# Altium PCB Upper Board.PcbDoc
Units mm, origin at the board's own origin, x right, y up, seen from the top; angles counter-clockwise.
Board outline 175.99 x 147.23 mm, 2 copper layers (Top Layer, Bottom Layer); 41 components, 65 nets, 224 pads, 72 vias.
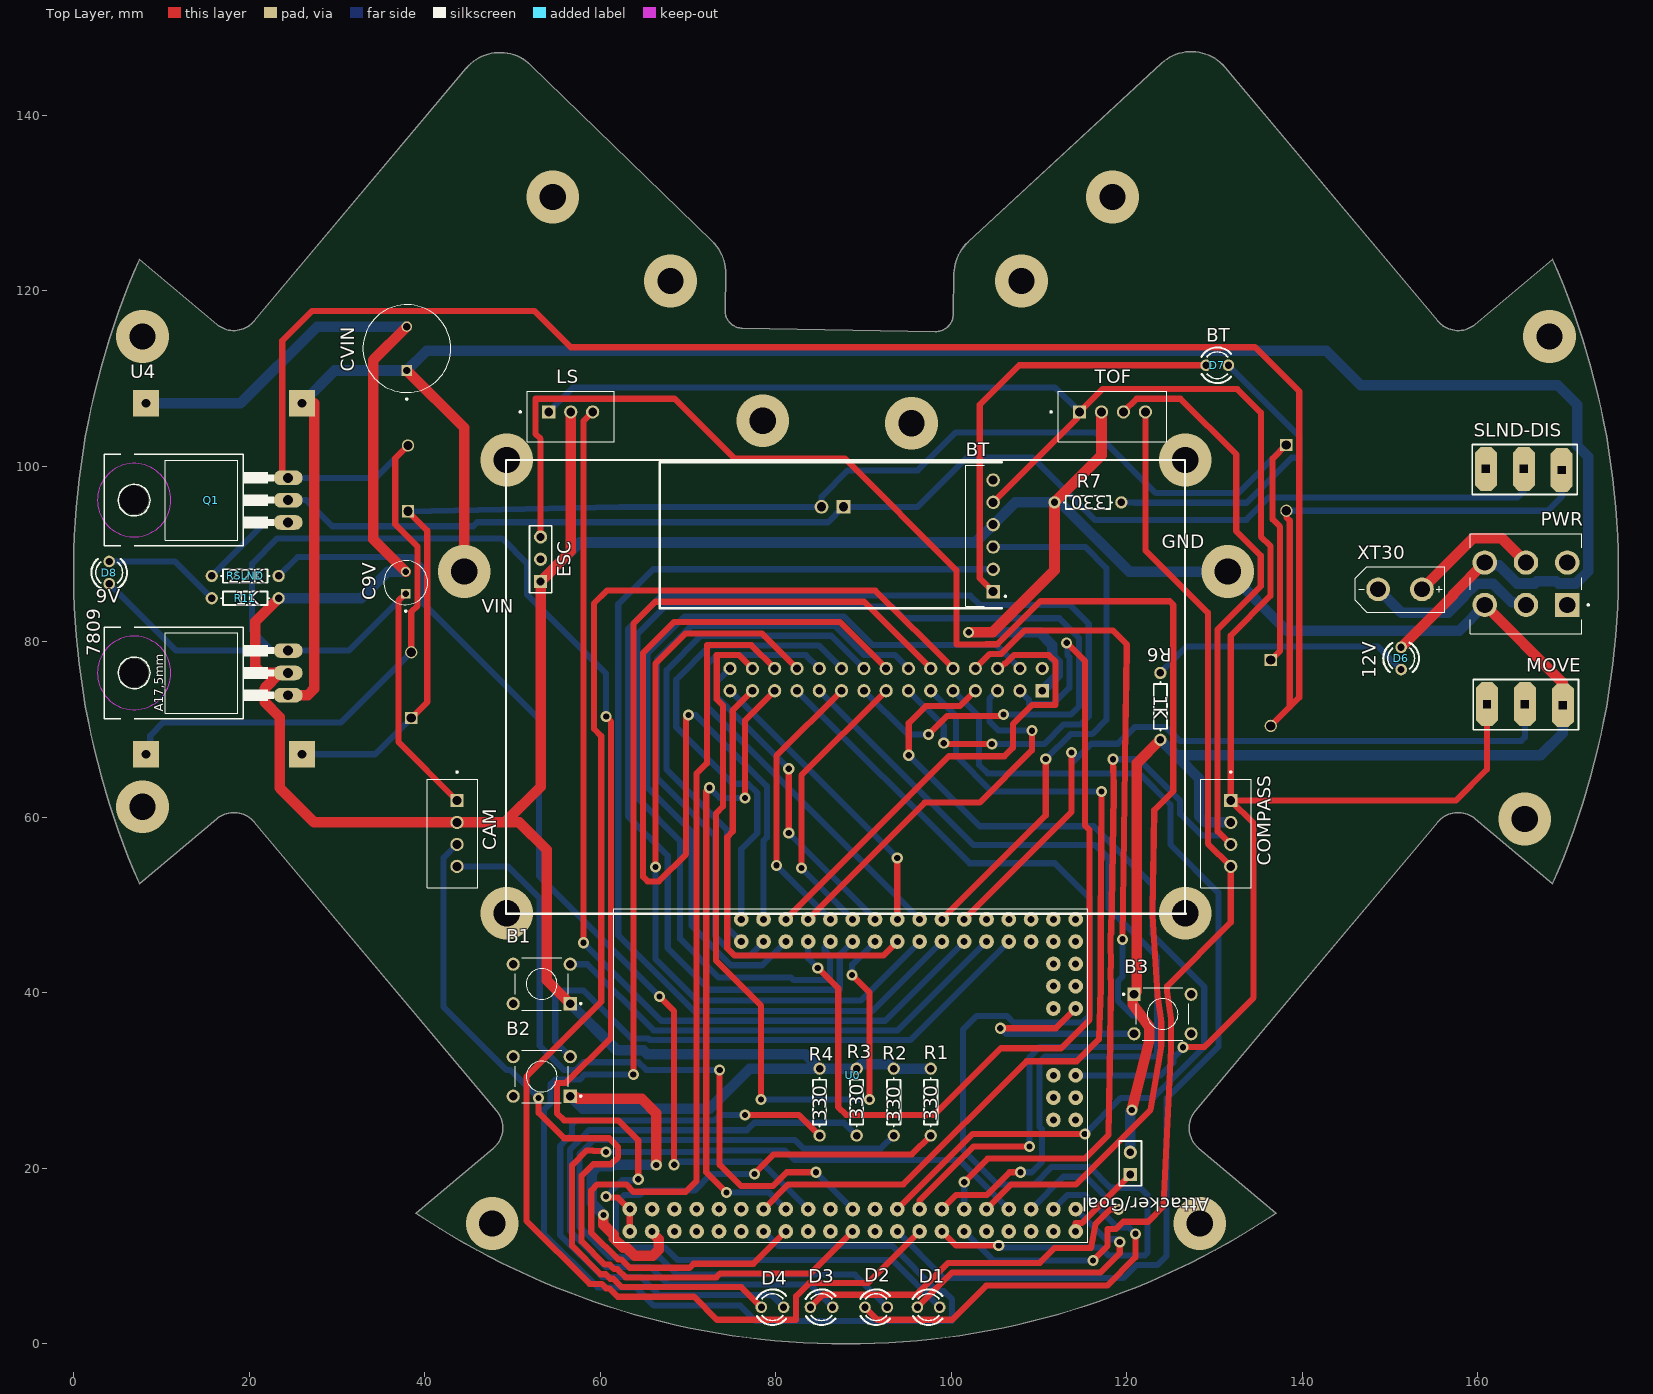
[diagram p0: Top Layer view]
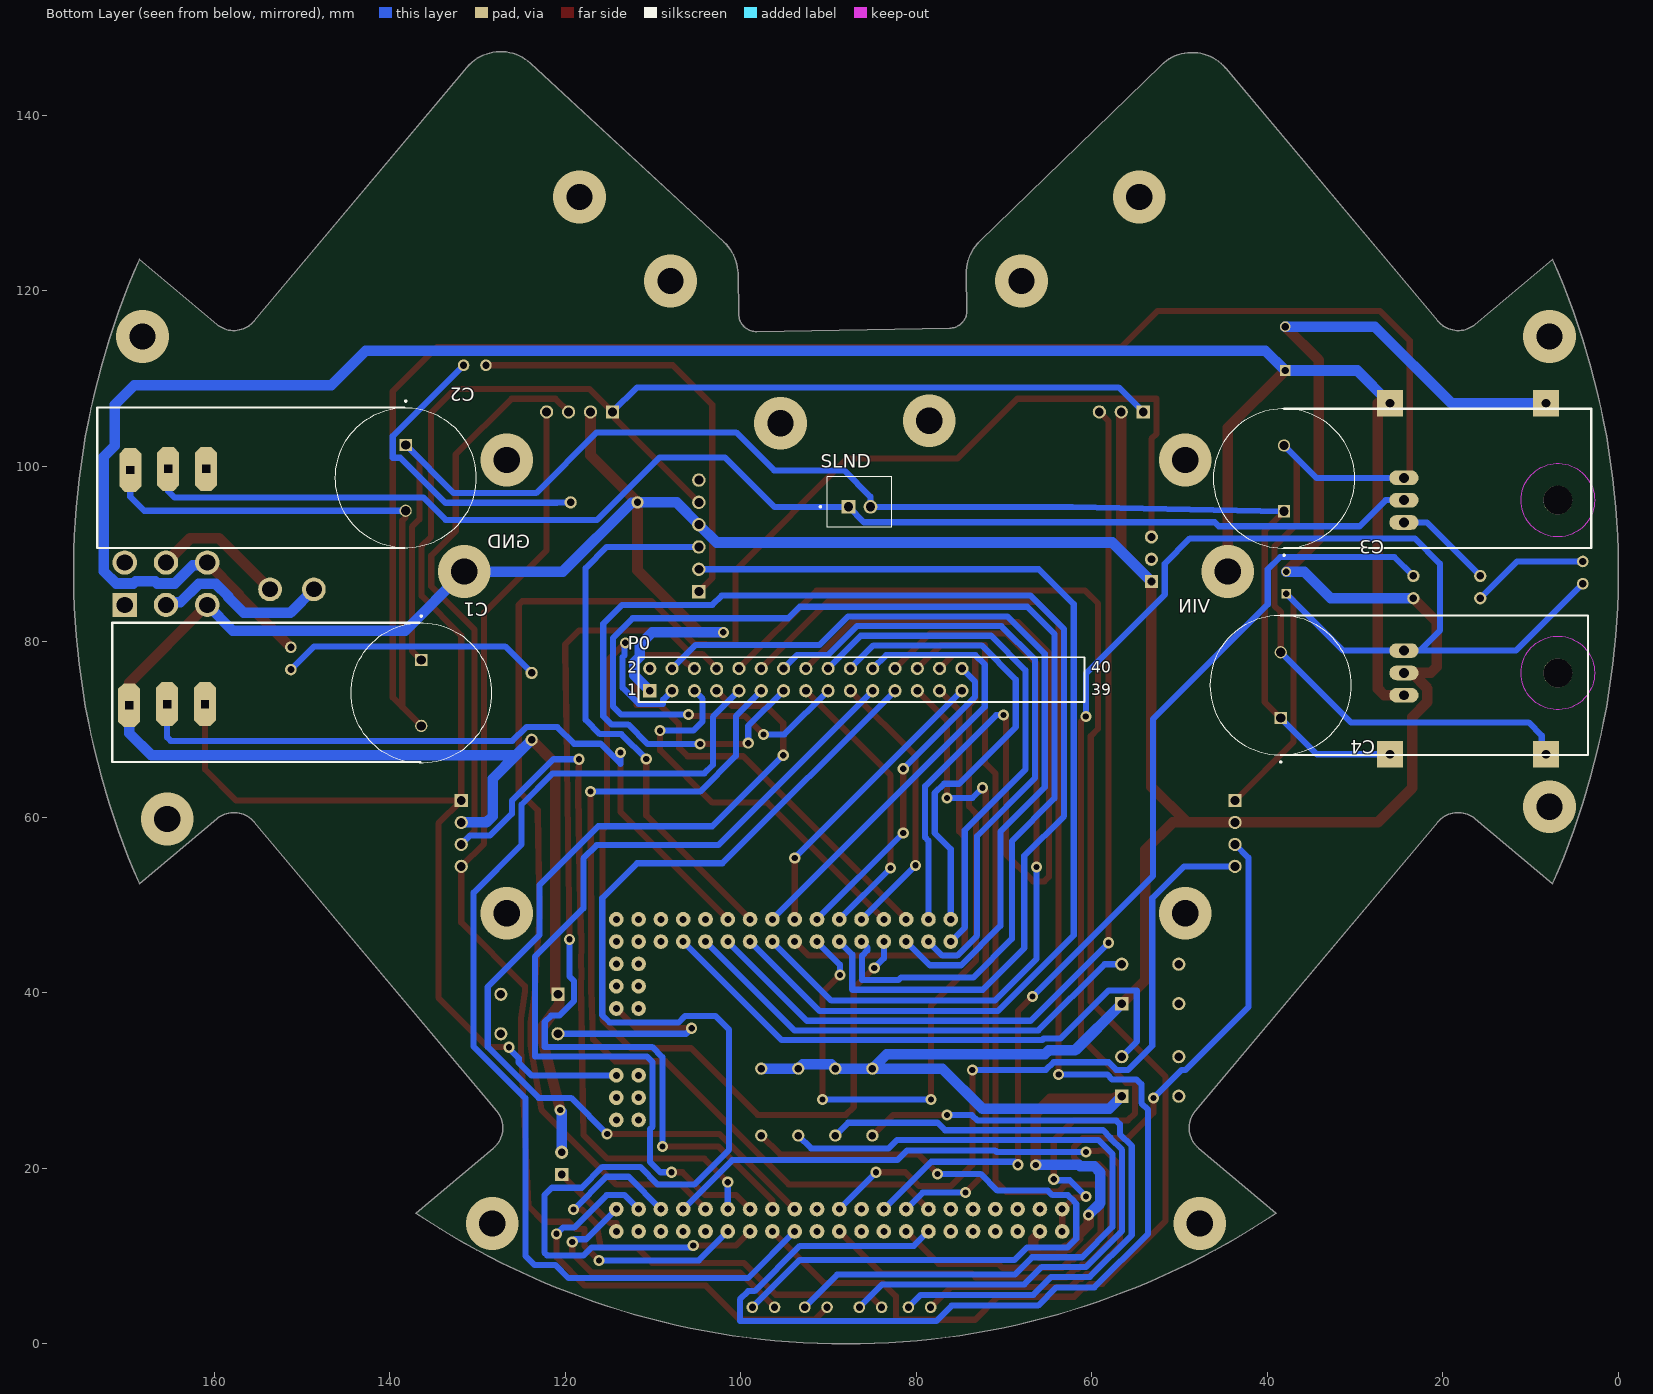
[diagram p1: Bottom Layer view, seen from below]
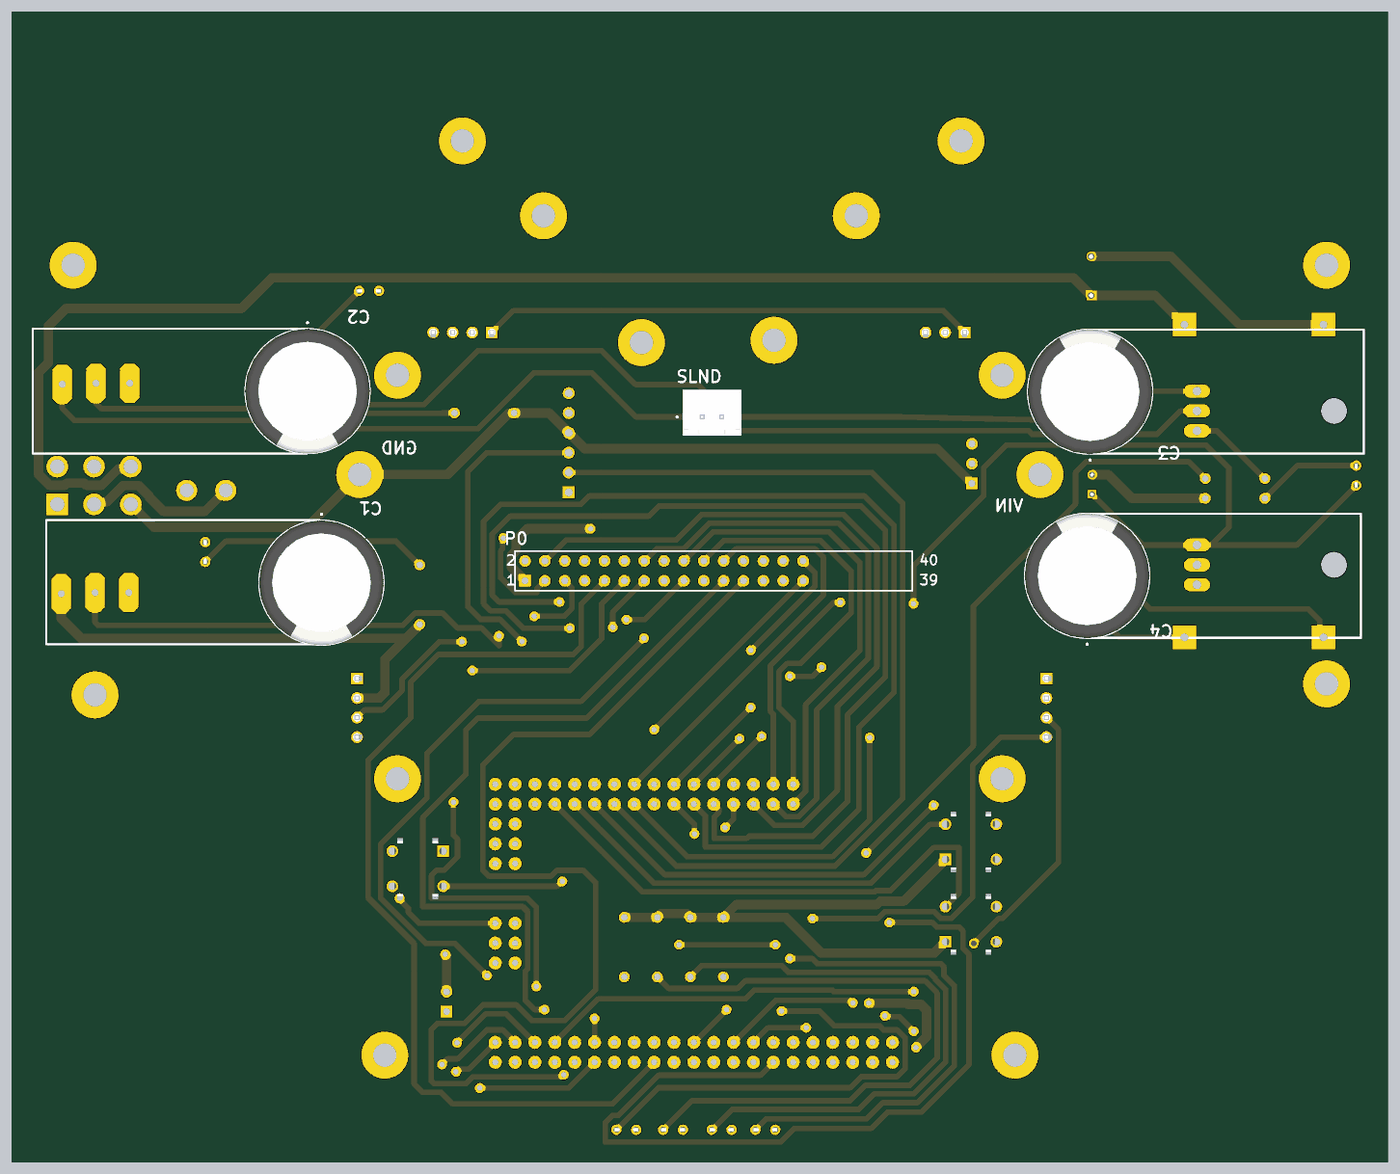
[diagram p2: 3D render of the assembled board from below, using the file's embedded part models]

## Layer stack, top to bottom
Top Solder: solder mask 0.0102, Solder Resist, Dk 3.5
Top Layer: signal copper 0.0356
Dielectric 1: dielectric 0.32, FR-4, Dk 4.8
Bottom Layer: signal copper 0.0356
Bottom Solder: solder mask 0.0102, Solder Resist, Dk 3.5

## Board outline
7.511,52.446 16.337,59.851 cw(c18.265,57.553) 20.563,59.481 48.203,26.541 cw(c45.905,24.613) 47.833,22.315 39.008,14.909 ccw(c88.006,88.006) 137.005,14.909 128.179,22.315 cw(c130.108,24.613) 127.81,26.541 155.449,59.481 cw(c157.748,57.553) 159.676,59.851 168.501,52.446 ccw(c88.006,88.006) 168.501,123.567 159.676,116.162 cw(c157.748,118.46) 155.449,116.532 131.181,145.454 ccw(c127.35,142.24) 123.957,145.913 101.912,125.547 ccw(c105.305,121.874) 100.306,121.964 100.222,117.304 cw(c98.222,117.34) 98.186,115.341 76.19,115.736 cw(c76.226,117.736) 74.226,117.772 74.301,121.931 ccw(c69.302,122.021) 72.785,125.608 52.061,145.727 ccw(c48.578,142.139) 44.748,145.353 20.563,116.532 cw(c18.265,118.46) 16.337,116.162 7.511,123.567 ccw(c88.006,88.006)

## Design rules (kind name [scope] priority, off if disabled: settings)
Clearance [All] p1: gap=0.4 ignorepadtopadclearanceinfootprint=TRUE
PolygonConnect [All] p1: connectstyle=Relief reliefconductorwidth=0.254 reliefentries=4 polygonreliefangle="90 Angle" airgapwidth=0.254
RoutingVias [All] p1: holewidth=0.711 width=1.27 viastyle="Through Hole" minholewidth=0.711 minwidth=1.27 maxholewidth=0.711 maxwidth=1.27
SolderMaskExpansion [All] p1: expansion=0.102 istentingtop=FALSE
Width [All] p1: maxlimit=1.2 minlimit=0.6 preferedwidth=0.7 minimp=50.000000 maximp=50.000000 favimp=50.000000
30 further rules are at their usual default settings.

## Components (designator, comment, footprint, x,y, rotation, side; value= is the part's Value field where it differs from the comment)
7809 "TIP120" TO220AH 18.085,76.454 r90 top
Attacker/Goal "Header 2" HDR1X2 120.396,19.304 r90 top
B1 "1825910-6" SW_1825910-6-4 53.34,41.021 r180 top
B2 "1825910-6" SW_1825910-6-4 53.34,30.48 r180 top
B3 "1825910-6" SW_1825910-6-4 124.079,37.592 r0 top
BT "ZC142200" MODULE_ZC142200 104.775,92.075 r180 top
C1 "EEUHD1H222" CAPPRD750W80D1600H3150 136.398,74.17 r270 bottom
C2 "EEUHD1H222" CAPPRD750W80D1600H3150 138.176,98.679 r270 bottom
C3 "EEUHD1H222" CAPPRD750W80D1600H3150 38.1,98.612 r90 bottom
C4 "EEUHD1H222" CAPPRD750W80D1600H3150 38.481,75.057 r90 bottom
C9V "EEUHD1C101" CAPPRD250W50D500H1100 37.846,86.741 r90 top
CAM "B4B-XH-A(LF)(SN)" JST_B4B-XH-A(LF)(SN) 43.163,58.166 r90 top
COMPASS "B4B-XH-A(LF)(SN)" JST_B4B-XH-A(LF)(SN) 131.318,58.166 r90 top
CVIN "EEUFR1C102B" CAPPRD500W60D1000H1600 37.973,113.411 r90 top
D1 "TLLG4400" LED3MM 97.409,4.191 r0 top
D2 "TLLG4400" LED3MM 91.44,4.191 r0 top
D3 "TLLG4400" LED3MM 85.217,4.191 r0 top
D4 "TLLG4400" LED3MM 79.629,4.191 r0 top
D6 "12V" LED3MM 151.257,78.105 r270 top
D7 "BT" LED3MM 130.302,111.506 r0 top
D8 "9V" LED3MM 4.064,87.884 r90 top
ESC "Header 3" HDR1X3 53.213,86.868 r90 top
LS "B3B-XH-A(LF)(SN)" JST_B3B-XH-A(LF)(SN) 56.642,105.664 r180 top
MOVE "100SP1T1B4M2QE" 3_pin_toggle_switch 165.354,72.898 r90 top
P0 "Header 20X2" HDR2X20 110.363,74.422 r180 bottom
PWR "100DP1T1B1M2QEH" SW_100DP1T1B1M2QEH 165.48,86.616 r180 top
Q1 "TIP120" TO220AH 18.085,96.139 r90 top
R1 "330" AXIAL-0.3 97.663,27.559 r90 top
R2 "330" AXIAL-0.3 93.442,27.559 r90 top
R3 "330" AXIAL-0.3 89.22,27.559 r90 top
R4 "330" AXIAL-0.3 84.999,27.559 r90 top
R6 "1K" AXIAL-0.3 123.825,72.644 r270 top
R7 "330" AXIAL-0.3 115.57,95.885 r180 top
R11 "1K" AXIAL-0.3 19.558,84.963 r0 top
RSLND "22K" AXIAL-0.3 19.558,87.503 r180 top
SLND "B2B-XH-A(LF)(SN)" JST_B2B-XH-A(LF)(SN) 86.467,95.902 r180 bottom
SLND-DIS "100SP1T1B4M2QE" 3_pin_toggle_switch 165.227,99.695 r90 top
TOF "B4B-XH-A(LF)(SN)" JST_B4B-XH-A(LF)(SN) 118.364,105.664 r180 top
U0 "MEGA_PRO_EMBED_CH340G_/_ATMEGA2560" MODULE_MEGA_PRO_EMBED_CH340G_/_ATMEGA2560 88.573,30.607 r0 top
U4 "XL6009 Boost converter   Vin: 3-35V, 4A Vout: 5-35V, 2A Quiescent current: 18mA Switching frequency: 400KHz Ripple: 50mV Voltage regulation: 0.5% Size: 43 x 22 x 16mm" XL6009_BOOST_MODULE 8.255,107.183 r270 top
XT30 "XT30UPB-M" XT30UPB-M 151.13,85.979 r180 top

## Footprints (in the part's own frame and the unit in brackets; to place one, negate y for a bottom-side part, rotate by r counter-clockwise, add the part's x,y. Pads: shape width x height; smd on the part's side, far side on the other; paste and mask are expansions set on the pad)
3_pin_toggle_switch [mm]
  oct 5x2.5 hole 0.9 square: 1(0,4.318) 2(0,0) 3(-0.127,-4.318)
  silkscreen extent -2.92,-6.1 2.79,5.87
AXIAL-0.3 [mm] "Axial Device, Thru-Hole; 2 Leads; 0.3 in Pin Spacing"
  round 1.4 hole 0.85: 1(-3.81,0) 2(3.81,0)
  silkscreen extent -2.77,-0.76 2.77,0.76
CAPPRD250W50D500H1100 [mm]
  round 1.1 hole 0.75: N(1.25,0)
  rect 1.1x1.1 hole 0.75: P(-1.25,0)
  silkscreen extent -3.35,-2.5 2.5,2.5, body extent -2.5,-2.5 2.5,2.5, height 11
CAPPRD500W60D1000H1600 [mm]
  round 1.2 hole 0.85: N(2.5,0)
  rect 1.2x1.2 hole 0.85: P(-2.5,0)
  silkscreen extent -5.85,-5 5,5, body extent -5,-5 5,5, height 16
CAPPRD750W80D1600H3150 [mm]
  round 1.4 hole 1.05: N(3.75,0)
  rect 1.4x1.4 hole 1.05: P(-3.75,0)
  silkscreen extent -8.85,-8 8,8, body extent -8,-8 8,8, height 31.5
HDR1X2 [mm] "Connector; Header; 2 Position"
  rect 1.5x1.5 hole 0.9: 1(0,0)
  round 1.5 hole 0.9: 2(2.54,0)
  silkscreen extent -1.27,-1.27 3.81,1.27
HDR1X3 [mm] "Connector; Header; 3 Position"
  rect 1.5x1.5 hole 0.9: 1(0,0)
  round 1.5 hole 0.9: 2(2.54,0) 3(5.08,0)
  silkscreen extent -1.27,-1.27 6.35,1.27
HDR2X20 [mm] "Connector; Header; 20x2 Position"
  rect 1.5x1.5 hole 0.9: 1(0,0)
  round 1.5 hole 0.9: 2(0,2.54) 3(2.54,0) 4(2.54,2.54) 5(5.08,0) 6(5.08,2.54) 7(7.62,0) 8(7.62,2.54) 9(10.16,0) 10(10.16,2.54) 11(12.7,0) 12(12.7,2.54) 13(15.24,0) 14(15.24,2.54) 15(17.78,0) 16(17.78,2.54) 17(20.32,0) 18(20.32,2.54) 19(22.86,0) 20(22.86,2.54) 21(25.4,0) 22(25.4,2.54) 23(27.94,0) 24(27.94,2.54) 25(30.48,0) 26(30.48,2.54) 27(33.02,0) 28(33.02,2.54) 29(35.56,0) 30(35.56,2.54)
  silkscreen extent -1.27,-1.27 49.53,3.81
JST_B2B-XH-A(LF)(SN) [mm]
  rect 1.575x1.575 / inner round 1.575 / far side rect 1.575x1.575 hole 1.05: 1(-1.25,-0.525)
  round 1.575 hole 1.05: 2(1.25,-0.525)
  silkscreen extent -4.55,-2.88 3.7,2.87, body extent -3.7,-2.88 3.7,2.88, height 7
JST_B3B-XH-A(LF)(SN) [mm]
  rect 1.508x1.508 / inner round 1.508 / far side rect 1.508x1.508 hole 1: 1(2.5,-0.525)
  round 1.508 hole 1: 2(0,-0.525) 3(-2.5,-0.525)
  silkscreen extent -4.95,-2.88 5.85,2.87, body extent -4.95,-2.88 4.95,2.88, height 7
JST_B4B-XH-A(LF)(SN) [mm]
  rect 1.508x1.508 / inner round 1.508 / far side rect 1.508x1.508 hole 1: 1(3.75,-0.525)
  round 1.508 hole 1: 2(1.25,-0.525) 3(-1.25,-0.525) 4(-3.75,-0.525)
  silkscreen extent -6.2,-2.88 7.1,2.87, body extent -6.2,-2.88 6.2,2.88, height 7
LED3MM [mil]
  round 52 hole 32: A(-50,0) K(50,0)
  silkscreen extent -71,-80 61,80, body extent -63,-63 63,63, height 240
MODULE_MEGA_PRO_EMBED_CH340G_/_ATMEGA2560 [mm]
  round 1.676 hole 0.8: 3V3_1(-17.58,-17.78) 3V3_2(-17.58,-15.24) 5V_1(-20.12,-17.78) 5V_2(-20.12,-15.24) 5V_3(25.6,0) A0(-12.5,17.78) A1(-12.5,15.24) A2(-9.96,17.78) A3(-9.96,15.24) A4(-7.42,17.78) A5(-7.42,15.24) A6(-4.88,17.78) A7(-4.88,15.24) A8(-2.34,17.78) A9(-2.34,15.24) A10(0.2,17.78) A11(0.2,15.24) A12(2.74,17.78) A13(2.74,15.24) A14(5.28,17.78) A15(5.28,15.24) AREF(-15.04,-15.24) D2(-9.96,-15.24) D3(-9.96,-17.78) D4(-7.42,-15.24) D5(-7.42,-17.78) D6(-4.88,-15.24) D7(-4.88,-17.78) D8(-2.34,-15.24) D9(-2.34,-17.78) D10(0.2,-15.24) D11(0.2,-17.78) D12(2.74,-15.24) D13(2.74,-17.78) D14(5.28,-15.24) D15(5.28,-17.78) D16(7.82,-15.24) D17(7.82,-17.78) D18(10.36,-15.24) D19(10.36,-17.78) D20(12.9,-15.24) D21(12.9,-17.78) D22(15.44,-15.24) D23(15.44,-17.78) D24(17.98,-15.24) D25(17.98,-17.78) D26(20.52,-15.24) D27(20.52,-17.78) D28(23.06,-15.24) D29(23.06,-17.78) D30(25.6,-15.24) D31(25.6,-17.78) D32(7.82,17.78) D33(7.82,15.24) D34(10.36,17.78) D35(10.36,15.24) D36(12.9,17.78) D37(12.9,15.24) D38(15.44,17.78) D39(15.44,15.24) D40(17.98,17.78) D41(17.98,15.24) D42(20.52,17.78) D43(20.52,15.24) D44(23.06,17.78) D45(23.06,15.24) D46(25.6,17.78) D47(25.6,15.24) D48(25.6,12.7) D49(23.06,12.7) D50(25.6,10.16) D51(23.06,10.16) D52(25.6,7.62) D53(23.06,7.62) GND_1(-22.66,-17.78) GND_2(-22.66,-15.24) GND_3(25.6,-5.08) MISO(23.06,0) MOSI(25.6,-2.54) RESET(23.06,-5.08) RST(-15.04,-17.78) RX(-12.5,-15.24) SCK(23.06,-2.54) TX(-12.5,-17.78) VIN_1(-25.2,-17.78) VIN_2(-25.2,-15.24)
  silkscreen extent -27,-19 27,19
MODULE_ZC142200 [mm]
  rect 1.53x1.53 hole 1.02: 1(0,6.35)
  round 1.53 hole 1.02: 2(0,3.81) 3(0,1.27) 4(0,-1.27) 5(0,-3.81) 6(0,-6.35)
  silkscreen extent -1.5,-8.05 3.1,8.05
SW_100DP1T1B1M2QEH [mm]
  rect 2.775x2.775 hole 1.85: 1(-4.7,2.415)
  round 2.775 hole 1.85: 2(0,2.415) 3(4.7,2.415) 4(-4.7,-2.415) 5(0,-2.415) 6(4.7,-2.415)
  silkscreen extent -7.2,-5.72 6.35,5.72
SW_1825910-6-4 [mm]
  rect 1.498x1.498 / inner round 1.498 / far side rect 1.498x1.498 hole 0.99: 1(-3.25,2.25)
  round 1.498 hole 0.99: 2(3.25,2.25) 3(-3.25,-2.25) 4(3.25,-2.25)
  silkscreen extent -4.54,-3 3,3, body extent -3,-3.9 3,3.9, height 5.01
TO220AH [mil]
  oval 66x132 hole 44: B(-100,-250) C(0,-250) E(100,-250)
  round 130 hole 130 unplated: ""(0,440)
  Keep-Out Layer circle w0: c0,440 r165
  Keep-Out Layer circle w0: c0,440 r165
  silkscreen extent -205,-185 205,575
XL6009_BOOST_MODULE [mm]
  rect 3x3 / inner round 2.772 / far side rect 3x3 hole 1: V_IN(0,17.78) V_IN_GND(0,0) V_OUT(40,17.78) V_OUT_GND(40,0)
XT30UPB-M [mm]
  round 2.7 hole 1.8: P$1(-2.5,0) P$2(2.5,0)
  silkscreen extent -5.1,-2.6 5.1,2.6

## Part data
7809 Q1: "Bipolar _BJT_ Transistor NPN - Darlington 60V 5A 2W Through Hole TO-220-3", Package="TO-220-3 Bourns", Availability=Unavailable, MF="ON Semiconductor", MP=TIP120, Price=None, SnapEDA_Link=https://www.snapeda.com/parts/TIP120/ON%20Semiconductor/view-part/2842527/?ref=snap
Attacker/Goal: "Header, 2-Pin", LatestRevisionDate=17-Jul-2002, LatestRevisionNote="Re-released for DXP Platform.", Publisher="Altium Limited"
B1 B2 B3: "Switch Push Button OFF (ON) SPST Round Button 0.05A 24VDC Momentary Contact PC Pins Thru-Hole", Package=None, Check_prices=https://www.snapeda.com/parts/1825910-6/TE+Connectivity+ALCOSWITCH+Switches/view-part/?ref=eda, Digi-Key_Part_Number=450-1650-ND, MF="TE Connectivity", MP=1825910-6, Purchase-URL=https://pricing.snapeda.com/search/part/1825910-6/?ref=eda, SnapEDA_Link=https://www.snapeda.com/parts/1825910-6/TE+Connectivity+ALCOSWITCH+Switches/view-part/?ref=snap
BT: "1pc HC-05 6 Pin Wireless Bluetooth RF Transceiver Module Serial For Arduino", Package=None, Availability=Unavailable, MP=ZC142200, Price=None
C1 C2 C3 C4: "2200ÂµF 50V Aluminum Electrolytic Capacitors Radial, Can 2000 Hrs @ 105Â°C", Package="RADIAL-2 Panasonic", Availability="In Stock", Check_prices=https://www.snapeda.com/parts/EEUHD1H222/Panasonic/view-part/5790753/?ref=eda, MF=Panasonic, MP=EEUHD1H222, Price=None, SnapEDA_Link=https://www.snapeda.com/parts/EEUHD1H222/Panasonic/view-part/5790753/?ref=snap
C9V: "CAP ALUM 100UF 20% 16V RADIAL", Package="RADIAL-2 Panasonic", Availability="In Stock", Check_prices=https://www.snapeda.com/parts/EEUHD1C101/Panasonic/view-part/5791153/?ref=eda, MF=Panasonic, MP=EEUHD1C101, Price=None, SnapEDA_Link=https://www.snapeda.com/parts/EEUHD1C101/Panasonic/view-part/5791153/?ref=snap
CAM COMPASS TOF: "Connector Header Through Hole 4 position 0.098 (2.50mm)", Package=None, Check_prices=https://www.snapeda.com/parts/B4B-XH-A(LF)(SN)/JST+Sales+America+Inc./view-part/?ref=eda, MF="JST Sales", MP=B4B-XH-A(LF)(SN), SnapEDA_Link=https://www.snapeda.com/parts/B4B-XH-A(LF)(SN)/JST+Sales+America+Inc./view-part/?ref=snap
CVIN: "CAP ALUM 1000UF 20% 16V RADIAL", Package="RADIAL-2 Panasonic", Availability="In Stock", Check_prices=https://www.snapeda.com/parts/EEU-FR1C102B/Panasonic/view-part/2318035/?ref=eda, MF=Panasonic, MP=EEU-FR1C102B, Price=None, Purchase-URL=https://pricing.snapeda.com/search/part/EEU-FR1C102B/?ref=eda, SnapEDA_Link=https://www.snapeda.com/parts/EEU-FR1C102B/Panasonic/view-part/2318035/?ref=snap
D1 D2 D3 D4: "Green 569nm LED Indication - Discrete 1.9V Radial", Package=None, Availability="In Stock", Check_prices=https://www.snapeda.com/parts/TLLG4400/Vishay/view-part/?ref=eda, MF="Vishay Semiconductors", MP=TLLG4400, Price=None, Purchase-URL=https://pricing.snapeda.com/search/part/TLLG4400/?ref=eda, SnapEDA_Link=https://www.snapeda.com/parts/TLLG4400/Vishay/view-part/?ref=snap
D6 D7 D8: library part TLLG4400, "Green 569nm LED Indication - Discrete 1.9V Radial", Package=None, Availability="In Stock", Check_prices=https://www.snapeda.com/parts/TLLG4400/Vishay/view-part/?ref=eda, MF="Vishay Semiconductors", MP=TLLG4400, Price=None, Purchase-URL=https://pricing.snapeda.com/search/part/TLLG4400/?ref=eda, SnapEDA_Link=https://www.snapeda.com/parts/TLLG4400/Vishay/view-part/?ref=snap
ESC: "Header, 3-Pin", LatestRevisionDate=17-Jul-2002, LatestRevisionNote="Re-released for DXP Platform.", Publisher="Altium Limited"
LS: "Connector Header Through Hole 3 position 0.098 (2.50mm)", Package=None, Check_prices=https://www.snapeda.com/parts/B3B-XH-A(LF)(SN)/JST+Sales+America+Inc./view-part/?ref=eda, MF="JST Sales", MP=B3B-XH-A(LF)(SN), SnapEDA_Link=https://www.snapeda.com/parts/B3B-XH-A(LF)(SN)/JST+Sales+America+Inc./view-part/?ref=snap
MOVE SLND-DIS: "Toggle Switch SPDT Through Hole", Package=None, Availability=Unavailable, MP=100SP1T1B4M2QE, Price=None
P0: "Header, 20-Pin, Dual row", LatestRevisionDate=17-Jul-2002, LatestRevisionNote="Re-released for DXP Platform.", Publisher="Altium Limited"
PWR: Package=None, Availability=Unavailable, MP=100DP1T1B1M2QEH, Price=None
R1 R2 R3 R4 R6 R7 R11 RSLND: library part Res1, "Resistor", LatestRevisionDate=17-Jul-2002, LatestRevisionNote="Re-released for DXP Platform.", PackageDescription="Axial Device, Thru-Hole; 2 Leads; 0.3 in Pin Spacing", PackageReference=AXIAL-0.3, Published=8-Jun-2000, Publisher="Altium Limited"
SLND: "Connector Header Through Hole 2 position 0.098 (2.50mm)", Package=None, Check_prices=https://www.snapeda.com/parts/B2B-XH-A(LF)(SN)/JST+Sales+America+Inc./view-part/?ref=eda, MF="JST Sales", MP=B2B-XH-A(LF)(SN), SnapEDA_Link=https://www.snapeda.com/parts/B2B-XH-A(LF)(SN)/JST+Sales+America+Inc./view-part/?ref=snap
U0: "Mega 2560 PRO (Embed) CH340G/ATmega2560-16AU", Package=None, Availability=Unavailable, MP=MEGA_PRO_EMBED_CH340G_/_ATMEGA2560, Price=None
U4: library part XL6009_BOOST_MODULE, DeviceSetName=XL6009_BOOST_MODULE, GateName_1=G$1, LibraryName=breakout-modules, Package=XL6009_BOOST_MODULE, SymbolName_1=XL6009_BOOST_MODULE
XT30: "Socket; DC supply; XT30; male; PIN: 2; on PCBs; THT; yellow; 15A; 500V", Package=None, Availability="Not in stock", Check_prices=https://www.snapeda.com/parts/XT30UPB-M/AMASS/view-part/?ref=eda, MF=amass, MP=XT30UPB-M, Price=None, SnapEDA_Link=https://www.snapeda.com/parts/XT30UPB-M/AMASS/view-part/?ref=snap

## Via types
v1: diameter 1.27, hole 0.711, Top Layer to Bottom Layer, 54 vias
v2: diameter 6, hole 3, Top Layer to Bottom Layer, 18 vias

## Nets (pads, with @x,y where several pads share a name; then routed paths per layer and width w, separated by ;. In a path a pad name is that pad's centre, name@x,y a point inside that pad or via, vN(x,y) a via of type N, cw(c..) or ccw(c..) an arc to the next point about the centre after c; other vN are vias at no path point)
5V: BT.5 COMPASS.1 LS.1 MOVE.1 TOF.1 U0.5V_3 | length 232.4
  Top Layer w0.7: BT.5 114.3,105.41 TOF.1 117.218,108.793 132.583,108.793 135.28,106.096 135.28,91.991 136.356,90.916 136.356,85.226 131.843,80.713 COMPASS.1 ; v1(126.413,33.811) 128.828,33.843 129.033,34.048 134.45,39.465 134.45,59.309 COMPASS.1 ; MOVE.1 161.036,65.472 157.48,61.916 COMPASS.1
  Bottom Layer w0.7: LS.1 56.944,108.991 111.812,108.991 TOF.1 ; U0.5V_3 123.841,30.607 125.29,32.056 125.29,32.551 126.413,33.674 v1(126.413,33.811)
5V_motors: P0.2
9V: 7809.E C9V.P CAM.1 D8.A U0.VIN_1 U0.VIN_2 | length 205.9
  Top Layer w0.7: C9V.P 37.008,84.653 37.008,68.596 CAM.1 ; v1(60.651,16.789) 60.76,16.68 62.016,16.68 63.329,15.367 U0.VIN_2 U0.VIN_1 ; v1(60.681,71.476) 61.239,70.917 61.239,34.9 56.083,29.743 55.067,29.743 55.067,26.289 55.88,25.476 62.052,25.476 64.338,23.19 v1(64.338,18.761)
  Bottom Layer w0.7: D8.A 11.684,78.994 22.631,78.994 ; C9V.P 31.349,78.994 7809.E 22.631,78.994 ; v1(60.651,16.789) 62.514,18.652 64.229,18.652 v1(64.338,18.761) ; v1(60.681,71.476) 60.681,76.378 51.689,85.369 51.689,88.9 48.819,91.77 23.216,91.77 20.345,88.9 20.345,81.28 22.631,78.994
B1: B1.3 U0.D39 | length 54.7
  Bottom Layer w0.7: B1.3 58.546,43.271 66.093,35.724 93.89,35.724 U0.D39
B2: B2.3 U0.D41 | length 66.9
  Bottom Layer w0.7: B2.3 54.878,34.442 54.878,40.284 58.09,40.284 63.584,34.79 65.471,34.79 65.637,34.624 95.33,34.624 U0.D41
B3: B3.3 U0.D52 | length 25
  Top Layer w0.7: v1(105.592,35.966) 111.912,35.966 U0.D52
  Bottom Layer w0.7: v1(105.592,35.966) 106.216,35.342 B3.3
BT-RX: BT.2 U0.D35 | length 125.8
  Bottom Layer w0.7: U0.D35 91.011,37.925 70.705,37.925 62.067,46.563 62.067,84.292 66.04,88.265 BT.2
BT-TX: BT.3 U0.D34 | length 63.1
  Top Layer w0.7: U0.D34 110.769,60.223 v1(110.769,66.65)
  Bottom Layer w0.7: BT.3 115.265,90.805 117.678,88.392 117.678,71.12 116.044,69.487 113.606,69.487 v1(110.769,66.65)
D1: D1.A U0.D30 | length 33.5
  Top Layer w0.7: D1.A 100.075,8.127 116.991,8.127 119.202,10.338 v1(119.202,11.608)
  Bottom Layer w0.7: U0.D30 117.609,11.931 118.879,11.931 v1(119.202,11.608)
D2: D2.A U0.D28 | length 48.9
  Top Layer w0.7: D2.A 91.592,2.769 100.101,2.769 103.988,6.655 117.78,6.655 120.98,9.855 v1(120.98,12.547)
  Bottom Layer w0.7: U0.D28 113.233,16.967 115.29,16.967 118.993,13.265 120.263,13.265 v1(120.98,12.547)
D3: D3.A U0.D26 | length 53.9
  Top Layer w0.7: D3.A 85.369,5.613 96.006,5.613 99.638,9.246 110.084,9.246 111.76,10.922 115.926,10.922 116.414,13.647 118.083,15.316 v1(119.05,15.316)
  Bottom Layer w0.7: U0.D26 112.776,19.05 115.316,19.05 v1(119.05,15.316)
D4: D4.A U0.D24 | length 87
  Top Layer w0.7: v1(60.655,21.862) 60.546,21.971 59.238,21.971 59.162,22.047 58.462,22.047 56.791,20.376 56.791,11.184 60.036,7.939 60.641,7.939 61.141,7.439 61.495,7.439 62.45,6.483 76.067,6.483 D4.A
  Bottom Layer w0.7: v1(60.655,21.862) 60.658,21.865 70.842,21.865 71.024,22.047 81.054,22.047 82.153,20.948 100.972,20.948 U0.D24
DISCHRGSLND: Q1.C SLND-DIS.2 SLND.1 | length 152.1
  Bottom Layer w0.7: Q1.C 26.518,96.139 29.489,93.167 45.542,93.167 45.999,93.624 85.964,93.624 SLND.1 96.159,95.377 101.798,101.016 109.22,101.016 116.357,93.878 133.602,93.878 136.167,96.444 164.516,96.444 165.227,97.155 SLND-DIS.2
ESCPWM: ESC.3 U0.D22 | length 189.7
  Top Layer w0.7: ESC.3 53.213,103.124 52.629,103.708 52.629,107.696 68.478,107.696 75.286,100.889 87.859,100.889 100.584,88.163 100.584,79.68 103.905,79.68 103.952,79.727 105.258,79.727 110.156,84.625 124.886,84.625 125.298,84.213 125.298,62.992 123.125,60.819 122.921,49.154 ; U0.D22 106.804,18.158 114.17,18.158 122.715,26.703 123.928,34.058 123.928,36.626 123.489,39.733 122.927,48.858 ; 122.921,49.154 ccw(c126.67,49.088) 122.927,48.858 ; 122.921,49.154 ccw(c126.67,49.088) 122.927,48.858
GND: 7809.C Attacker/Goal.2 B1.1 B2.1 B3.1 BT.4 C9V.N CAM.2 COMPASS.2 CVIN.N ESC.1 LS.2 MOVE.3 P0.1 PWR.3 R1.2 R2.2 R3.2 R4.2 R6.2 R7.2 R11.2 TOF.2 U0.GND_1 U4.V_IN_GND | length 621.2
  Top Layer w1.2: R11.2 20.701,82.296 20.701,77.157 21.404,76.454 7809.C@23.495,76.454 ; 7809.C 7809.C@23.495,76.454 ; C9V.N 34.163,91.674 34.163,112.101 CVIN.N ; B2.1 56.739,28.081 57.301,28.081 57.442,27.94 64.719,27.94 66.396,26.264 v1(66.396,20.396) ; B1.1 53.899,41.462 53.899,56.317 50.8,59.416 49.129,59.416 ; LS.2 56.642,90.297 ESC.1 53.213,63.5 49.129,59.416 ; v1(60.376,14.707) 60.376,13.578 61.535,12.419 61.535,12.066 62.612,10.989 62.965,10.989 63.921,10.033 65.972,10.033 66.675,10.736 66.675,11.936 65.913,12.698 U0.GND_1 ; v1(101.981,81.077) 104.699,81.077 111.76,88.138 R7.2 117.114,101.239 TOF.2 ; v1(120.574,26.645) 122.578,34.618 122.578,36.066 120.68,38.699 120.68,39.693 121.158,40.171 121.158,66.167 R6.2 ; PWR.3 169.672,75.309 MOVE.3 ; 7809.C@23.495,76.454 23.495,76.412 21.758,74.675 21.758,73.153 23.495,71.416 23.495,63.348 27.427,59.416 CAM.2 49.129,59.416
  Bottom Layer w1.2: U4.V_IN_GND 19.02,107.183 27.748,115.911 CVIN.N ; R11.2 32.766,84.963 35.794,87.991 C9V.N ; ESC.1 57.658,91.313 102.743,91.313 BT.4 107.315,95.885 R7.2 111.798,95.847 112.433,95.847 120.274,88.006 v2(131.506,88.006) 138.232,81.28 157.859,81.28 PWR.3 ; B2.1 58.023,26.797 72.455,26.797 77.027,31.369 R4.2 ; B1.1 61.921,33.44 64.912,33.44 65.358,32.995 83.374,32.995 R4.2 ; v1(60.376,14.707) 59.016,16.066 59.016,19.524 59.719,20.227 61.332,20.227 61.502,20.396 v1(66.396,20.396) ; R1.2 R2.2 92.951,31.86 89.711,31.86 R3.2 R4.2 ; v1(101.981,81.077) 110.058,81.077 111.509,79.626 111.509,78.291 112.113,77.687 112.113,76.172 P0.1 ; Attacker/Goal.2 120.396,26.467 v1(120.574,26.645) ; R6.2 125.603,67.056 ; COMPASS.2 128.973,59.416 128.27,60.119 128.27,64.389 125.603,67.056 ; MOVE.3 169.672,69.596 167.132,67.056 125.603,67.056
GO: MOVE.2 U0.D36 | length 83.3
  Top Layer w0.7: U0.D36 113.692,60.606 v1(113.692,67.376)
  Bottom Layer w0.7: v1(113.692,67.376) 113.692,66.106 115.972,68.387 118.983,68.387 120.881,70.284 124.426,70.284 126.003,68.707 164.944,68.707 165.354,69.117 MOVE.2
INA1: P0.7 U0.D14 | length 110.2
  Top Layer w0.7: U0.D14 102.405,23.919 v1(115.217,23.919) ; v1(95.148,67.074) 95.148,70.739 97.079,72.669 100.99,72.669 P0.7
  Bottom Layer w0.7: v1(95.148,67.074) 103.244,58.979 116.23,58.979 122.911,52.299 122.911,46.609 128.828,40.692 128.828,33.843 123.015,28.03 119.328,28.03 v1(115.217,23.919)
INA2: P0.8 U0.D16 | length 107.9
  Top Layer w0.7: U0.D16 96.393,16.351 102.546,22.504 v1(108.915,22.504) ; P0.8 104.408,78.627 105.714,78.627 108.392,81.305 118.389,81.305 119.99,79.705 119.99,79.125 119.808,66.731 119.808,66.726 119.808,66.051 v1(119.507,46.101)
  Bottom Layer w0.7: v1(108.915,22.504) 108.915,32.667 110.091,33.843 122.328,33.843 122.328,36.701 121.615,37.414 120.65,37.414 118.999,39.065 118.999,41.359 119.523,41.883 119.523,46.085 v1(119.507,46.101)
INA3: P0.21 U0.D18 | length 104.5
  Top Layer w0.7: U0.D18 100.521,16.955 104.046,16.955 106.648,19.558 v1(107.874,19.558)
  Bottom Layer w0.7: P0.21 102.54,56.845 116.408,56.845 117.932,55.321 117.932,49.634 123.444,44.123 123.444,32.741 110.668,32.741 110.033,32.106 110.033,24.765 110.338,24.46 110.338,20.752 109.144,19.558 v1(107.874,19.558)
INA4: P0.22 U0.D32 | length 52.9
  Bottom Layer w0.7: P0.22 83.439,78.486 73.269,78.486 72.203,77.42 72.203,72.577 U0.D32
INB1: P0.9 U0.D15 | length 123.4
  Bottom Layer w0.7: U0.D15 99.162,7.518 119.634,7.518 121.097,8.981 123.465,8.981 124.536,10.052 124.536,27.991 130.429,33.884 130.429,51.435 124.977,56.887 124.977,61.434 121.412,64.999 104.14,64.999 103.175,65.964 103.175,71.45 P0.9
INB2: P0.10 U0.D17 | length 174.6
  Top Layer w0.7: U0.D17 90.5,6.934 83.82,6.934 82.321,5.436 82.321,2.769 73.304,2.769 70.69,5.383 61.995,5.383 61.039,6.339 60.686,6.339 60.186,6.839 58.795,6.839 51.589,14.045 51.589,30.456 60.122,38.989 60.122,69.265 59.296,70.092 59.296,84.365 60.757,85.827 91.338,85.827 P0.10
INB3: P0.23 U0.D19 | length 142
  Top Layer w0.7: U0.D19 100.533,11.227 v1(105.41,11.227)
  Bottom Layer w0.7: P0.23 102.083,54.762 111.811,54.762 115.773,50.8 115.773,37.465 114.935,36.627 107.086,36.627 106.35,37.363 102.87,37.363 101.321,35.814 101.321,22.155 105.315,18.161 109.449,18.161 111.455,20.168 115.754,20.168 118.118,17.804 121.515,17.804 122.365,16.954 122.365,10.414 122.035,10.084 117.907,10.084 117.018,10.973 105.664,10.973 v1(105.41,11.227)
INB4: P0.24 U0.D33 | length 87.7
  Top Layer w0.7: v1(66.294,54.356) 66.294,77.521 69.723,80.95 78.435,80.95 P0.24
  Bottom Layer w0.7: v1(66.294,54.356) 66.294,43.891 71.056,39.13 89.676,39.13 U0.D33
INBAT: PWR.5 XT30.P$1 | length 15.4
  Top Layer w1.2: XT30.P$1 159.472,91.821 162.69,91.821 PWR.5
INGND: PWR.2 XT30.P$2 | length 20.4
  Bottom Layer w1.2: XT30.P$2 151.297,83.312 156.616,83.312 158.392,85.088 158.392,85.19 159.791,86.588 161.769,86.588 163.855,84.502 165.179,84.502 PWR.2
LS: LS.3 U0.D37 | length 111.7
  Top Layer w0.7: v1(58.09,45.719) 58.09,105.137 LS.3
  Bottom Layer w0.7: v1(58.09,45.719) 66.984,36.825 92.451,36.825 U0.D37
NetD1_K: D1.K R1.1 | length 83.2
  Top Layer w0.7: v1(77.572,19.38) 79.781,21.59 95.504,21.59 R1.1
  Bottom Layer w0.7: v1(77.572,19.38) 72.669,19.38 70.764,17.475 65.011,17.475 64.491,16.955 62.715,16.955 62.023,16.264 62.023,16.216 61.785,15.977 61.785,15.964 61.773,15.952 61.773,11.998 62.792,10.978 67.386,10.978 68.789,9.576 93.294,9.576 D1.K
NetD2_K: D2.K R2.1 | length 84.6
  Bottom Layer w0.7: D2.K 89.002,7.899 68.781,7.899 66.802,9.878 61.116,9.878 57.658,13.336 57.658,21.658 59.247,23.247 82.188,23.247 83.16,22.276 91.969,22.276 R2.1
NetD3_K: D3.K R3.1 | length 77.3
  Bottom Layer w0.7: D3.K 83.888,6.79 67.681,6.79 65.692,8.778 60.66,8.778 56.558,12.881 56.558,22.113 57.891,23.446 57.891,23.518 58.72,24.347 76.725,24.347 77.577,25.199 87.771,25.199 R3.1
NetD4_K: D4.K R4.1 | length 71.6
  Top Layer w0.7: v1(76.505,26.086) 82.663,26.086 R4.1
  Bottom Layer w0.7: v1(76.505,26.086) 73.653,26.086 73.015,25.447 57.201,25.447 56.791,25.037 56.791,23.902 55.458,22.569 55.458,12.411 60.223,7.645 64.618,7.645 66.662,5.601 79.489,5.601 D4.K
NetD6_K: D6.K R6.1 | length 29.8
  Bottom Layer w0.7: R6.1 126.848,79.477 148.615,79.477 D6.K
NetD7_K: D7.K R7.1 | length 36.3
  Bottom Layer w0.7: R7.1 120.904,95.885 120.955,95.834 133.655,95.834 138.786,100.965 139.649,100.965 139.649,103.429 D7.K
NetD8_K: D8.K R11.1 | length 13.4
  Bottom Layer w0.7: D8.K 11.557,89.154 R11.1
NetQ1_B: Q1.B RSLND.2 | length 11.2
  Bottom Layer w0.7: RSLND.2 21.844,93.599 Q1.B
PWM1: P0.11 U0.D2 | length 101.3
  Top Layer w0.7: U0.D2 81.419,18.173 94.551,18.173 108.585,32.207 114.3,32.207 116.815,34.723 117.038,40.535 117.038,43.746 117.022,45.072 117.022,47.13 v1(117.13,62.941)
  Bottom Layer w0.7: P0.11 100.557,71.528 100.557,67.019 104.634,62.941 v1(117.13,62.941)
PWM2: P0.12 U0.D3 | length 194.4
  Top Layer w0.7: v1(63.779,30.705) 63.779,82.042 66.294,84.557 90.068,84.557 P0.12
  Bottom Layer w0.7: v1(63.779,30.705) 58.241,30.705 57.667,30.131 54.896,30.131 54.359,29.594 54.359,27.447 53.594,26.682 53.594,12.557 59.699,6.452 64.033,6.452 66.114,4.371 75.969,4.371 77.724,2.616 100.101,2.616 100.101,5.08 99.162,6.02 98.417,6.02 93.261,11.176 80.264,11.176 U0.D3
PWM3: P0.25 U0.D4 | length 72.9
  Top Layer w0.7: v1(72.441,63.373) 72.085,63.017 72.085,19.558 v1(74.397,17.247) ; v1(76.505,62.205) 76.505,71.044 P0.25
  Bottom Layer w0.7: v1(72.441,63.373) 73.609,62.205 v1(76.505,62.205) ; v1(74.397,17.247) 79.273,17.247 U0.D4
PWM4: P0.26 U0.D5 | length 113.8
  Top Layer w0.7: P0.26 77.216,79.629 72.161,79.629 72.161,66.167 70.968,64.973 70.968,18.567 69.748,17.348 63.793,17.348 62.966,18.174 59.689,18.174 58.991,17.477 58.991,12.7 62.052,9.639 62.406,9.639 63.362,8.683 70.185,8.683 70.637,9.134 77.46,9.134 U0.D5
S1: P0.20 U0.A0 | length 54.4
  Bottom Layer w0.7: U0.A0 76.073,56.387 77.89,58.203 77.89,62.786 76.84,63.835 75.122,63.835 68.667,70.29 68.667,75.686 72.567,79.586 84.879,79.586 P0.20
S2: P0.18 U0.A1 | length 60.1
  Bottom Layer w0.7: U0.A1 74.485,47.435 74.485,58.527 67.567,65.444 67.567,76.786 71.467,80.686 86.319,80.686 P0.18
S3: P0.16 U0.A2 | length 106.8
  Top Layer w0.7: v1(70.052,71.653) 69.779,71.38 69.779,55.809 66.675,52.705 65.405,52.705 64.897,53.213 64.897,78.74 68.428,82.271 87.274,82.271 P0.16
  Bottom Layer w0.7: v1(70.052,71.653) 70.897,71.653 78.99,63.56 78.99,57.73 78.613,57.353 U0.A2
S4: P0.14 U0.A3 | length 73.5
  Bottom Layer w0.7: U0.A3 77.013,44.247 75.355,44.247 73.076,46.526 73.076,57.875 66.467,64.484 66.467,77.948 70.307,81.788 86.773,81.788 90.075,78.486 93.599,78.486 P0.14
S5: P0.6 U0.A4 | length 54.9
  Top Layer w0.7: U0.A4 99.724,66.958 106.045,66.958 107.014,67.927 107.014,70.618 109.207,72.81 111.887,72.81 111.887,77.724 111.125,78.486 107.128,78.486 106.169,77.527 106.064,77.527 105.499,76.962 P0.6
S6: P0.4 U0.A5 | length 93.5
  Bottom Layer w0.7: U0.A5 78.453,43.147 74.9,43.147 70.409,47.638 70.409,58.386 65.367,63.428 65.367,78.634 69.621,82.888 87.775,82.888 91.034,79.629 105.156,79.629 P0.4
S7: P0.5 U0.A6 | length 44.9
  Top Layer w0.7: U0.A6 96.982,61.676 103.218,61.676 109.195,67.652 v1(109.195,69.875)
  Bottom Layer w0.7: P0.5 104.346,73.485 104.346,70.94 105.41,69.875 v1(109.195,69.875)
S8: P0.3 U0.A7 | length 110.4
  Top Layer w0.7: v1(84.785,42.85) 87.122,40.513 87.122,26.999 88.023,26.098 98.057,26.098 105.652,33.692 112.503,33.692 115.763,36.953 115.763,58.54 115.24,59.063 115.24,77.786 v1(113.144,79.883)
  Bottom Layer w0.7: U0.A7 83.693,43.942 v1(84.785,42.85) ; P0.3 108.839,73.406 108.839,72.922 111.63,72.922 113.463,74.755 113.463,78.246 113.253,78.456 113.253,79.774 v1(113.144,79.883)
S9: P0.19 U0.A8 | length 31.7
  Top Layer w0.7: v1(80.086,54.534) 80.086,67.005 P0.19
  Bottom Layer w0.7: v1(80.086,54.534) U0.A8
S10: P0.17 U0.A9 | length 149.4
  Top Layer w0.7: v1(97.409,69.444) 99.516,71.551 105.79,71.551 v1(105.943,71.704)
  Bottom Layer w0.7: U0.A9 85.573,45.187 85.573,44.832 86.17,44.235 86.17,41.465 82.041,41.465 81.753,41.752 73.515,41.752 69.113,46.154 69.113,57.302 64.267,62.149 64.267,80.894 67.361,83.988 93.279,83.988 94.59,82.677 112.319,82.677 114.563,80.433 114.563,72.635 113.632,71.704 v1(105.943,71.704) ; P0.17 95.021,69.444 v1(97.409,69.444)
S11: P0.15 U0.A10 | length 32.5
  Top Layer w0.7: v1(82.93,54.23) 82.93,64.769 P0.15
  Bottom Layer w0.7: v1(82.93,54.23) U0.A10
S12: P0.13 U0.A11 | length 157.3
  Top Layer w0.7: v1(99.136,68.453) 99.238,68.351 v1(104.623,68.351)
  Bottom Layer w0.7: U0.A11 87.3,44.374 87.3,40.394 87.27,40.365 72.431,40.365 67.691,45.105 67.691,55.626 63.167,60.15 63.167,81.455 66.98,85.268 102.184,85.268 103.251,84.201 113.513,84.201 115.663,82.051 115.663,71.518 114.732,70.587 112.827,70.587 110.592,68.351 v1(104.623,68.351) ; P0.13 99.136,70.409 v1(99.136,68.453)
S13: P0.30 U0.A12 | length 36.7
  Top Layer w0.7: v1(81.483,58.217) v1(81.483,65.532)
  Bottom Layer w0.7: P0.30 73.303,75.462 73.303,73.712 v1(81.483,65.532) ; v1(81.483,58.217) U0.A12
S14: P0.28 U0.A13 | length 90.3
  Top Layer w0.7: P0.28 75.819,78.486 73.279,78.486 73.279,73.457 73.992,72.744 73.992,61.237 73.185,60.43 73.185,43.706 78.334,38.558 v1(78.334,27.864) ; v1(88.697,42.037) 90.678,40.056 v1(90.678,27.864)
  Bottom Layer w0.7: v1(78.334,27.864) v1(90.678,27.864) ; v1(88.697,42.037) 88.697,43.231 U0.A13
S15: P0.29 U0.A14 | length 33.9
  Top Layer w0.7: U0.A14 v1(93.853,55.372)
  Bottom Layer w0.7: P0.29 v1(93.853,55.372)
S16: P0.27 U0.A15 | length 50.9
  Top Layer w0.7: P0.27 75.108,72.187 75.108,58.395 74.473,57.76 74.473,45.085 75.311,44.247 92.253,44.247 U0.A15
SCL: COMPASS.4 TOF.4 U0.D21 | length 125.3
  Top Layer w0.7: v1(116.154,9.525) 117.817,11.188 117.817,13.093 118.756,13.093 119.595,13.932 122.416,13.932 124.179,15.695 125.028,33.603 125.028,37.081 124.589,40.189 124.589,40.769 131.843,48.023 COMPASS.4 129.239,57.02 129.239,83.308 122.114,90.433 TOF.4
  Bottom Layer w0.7: U0.D21 104.775,9.525 v1(116.154,9.525)
SDA: COMPASS.3 TOF.3 U0.D20 | length 147.3
  Top Layer w0.7: v1(101.473,18.44) 104.152,21.119 115.226,21.119 117.904,23.797 118.111,34.574 118.208,41.249 118.207,41.495 118.138,41.564 118.138,42.711 118.209,42.967 118.209,43.362 118.122,45.527 118.122,46.675 118.23,46.783 118.515,62.581 118.515,63.515 v1(118.423,66.624) ; TOF.3 121.118,107.693 126.114,107.693 132.461,101.346 132.461,92.608 135.256,89.813 135.256,86.336 130.339,81.419 130.339,58.42 COMPASS.3
  Bottom Layer w0.7: U0.D20 v1(101.473,18.44) ; v1(118.423,66.624) 121.342,66.624 126.077,61.889 126.077,60.403 128.568,57.912 130.847,57.912 COMPASS.3
SLND: RSLND.1 U0.D6 | length 115.3
  Top Layer w0.7: v1(66.751,39.599) 68.428,37.922 v1(68.428,20.422)
  Bottom Layer w0.7: RSLND.1 25.527,89.662 38.557,89.662 39.954,88.265 39.954,84.252 53.035,71.171 53.035,53.315 v1(66.751,39.599) ; v1(68.428,20.422) 68.771,20.765 78.295,20.765 U0.D6
SLNDGND: C1.N C2.N C3.N C4.N Q1.E SLND-DIS.3 U4.V_OUT_GND | length 311.1
  Top Layer w0.7: Q1.E 23.774,98.679 23.774,114.3 27.153,117.678 52.527,117.678 56.642,113.563 134.62,113.563 139.649,108.534 139.649,73.672 138.556,72.579 ; C3.N 36.65,100.912 36.65,93.396 39.196,90.85 39.196,84.131 38.481,83.416 C4.N ; C1.N 138.556,72.579 ; C2.N 138.176,94.191 138.556,93.811 138.556,72.579
  Bottom Layer w0.7: U4.V_OUT_GND 8.744,67.672 8.744,69.323 10.236,70.815 30.489,70.815 C4.N ; Q1.E 34.417,98.679 C3.N ; C2.N 167.954,94.929 169.545,96.52 SLND-DIS.3
SLNDV: C1.P C2.P C3.P C4.P SLND.2 U4.V_OUT | length 174.7
  Top Layer w0.7: C3.P 40.296,92.666 40.296,73.122 C4.P ; C1.P 137.456,78.979 137.456,93.091 136.601,93.946 136.601,100.854 C2.P
  Bottom Layer w0.7: U4.V_OUT 34.357,67.183 C4.P ; C3.P 62.186,95.377 SLND.2 85.217,96.52 88.214,99.517 96.19,99.517 100.533,103.861 116.408,103.861 123.317,96.952 132.699,96.952 C2.P
SRX: CAM.4 U0.D10 | length 79.4
  Top Layer w0.7: v1(73.609,31.217) 73.609,20.422 76.048,17.983 79.674,17.983 81.248,19.558 v1(84.582,19.558)
  Bottom Layer w0.7: CAM.4 49.495,54.416 53.111,50.8 53.111,33.985 55.866,31.231 57.211,31.231 58.07,32.09 64.353,32.09 65.227,31.217 v1(73.609,31.217) ; v1(84.582,19.558) U0.D10
STATE: BT.1 D7.A | length 49.6
  Top Layer w0.7: BT.1 103.251,87.249 103.251,107.01 107.747,111.506 D7.A
STX: CAM.3 U0.D11 | length 95
  Top Layer w0.7: v1(52.974,28.021) 52.988,28.006 52.988,26.336 55.88,23.444 61.032,23.444 62.04,22.436 62.04,21.288 61.229,20.477 59.208,20.477 57.891,19.159 57.891,11.692 60.544,9.039 61.097,9.039 61.597,8.539 61.95,8.539 62.906,7.583 73.218,7.583 73.669,8.034 83.98,8.034 U0.D11
  Bottom Layer w0.7: CAM.3 42.164,55.392 42.164,38.379 49.312,31.231 49.764,31.231 v1(52.974,28.021)
TS1: Attacker/Goal.1 U0.D31 | length 9.5
  Top Layer w0.7: U0.D31 114.173,13.767 114.859,13.767 Attacker/Goal.1
VINBAT: 7809.B CVIN.P D6.A PWR.6 U4.V_IN | length 259.8
  Top Layer w1.2: 7809.B 26.67,73.914 27.432,74.676 27.432,107.183 U4.V_IN ; CVIN.P 44.506,104.378 v2(44.506,88.006) ; D6.A 157.175,85.293 157.175,85.426 PWR.6
  Bottom Layer w1.2: U4.V_IN 29.763,110.911 CVIN.P 40.244,113.182 142.723,113.182 146.66,109.245 169.088,109.245 171.323,107.01 171.323,102.329 172.567,101.085 172.567,88.042 171.169,86.644 169.191,86.644 168.941,86.893 166.719,86.893 166.469,86.644 164.491,86.644 162.405,88.73 161.081,88.73 PWR.6
pads on no net: 7809. B1.2 B1.4 B2.2 B2.4 B3.2 B3.4 BT.6 ESC.2 PWR.1 PWR.4 Q1. SLND-DIS.1 U0.3V3_1 U0.3V3_2 U0.5V_1 U0.5V_2 U0.AREF U0.D7 U0.D8 U0.D9 U0.D12 U0.D13 U0.D23 U0.D25 U0.D27 U0.D29 U0.D38 U0.D40 U0.D42 U0.D43 U0.D44 U0.D45 U0.D46 U0.D47 U0.D48 U0.D49 U0.D50 U0.D51 U0.D53 U0.GND_2 U0.GND_3 U0.MISO U0.MOSI U0.RESET U0.RST U0.RX U0.SCK U0.TX
copper on no net:
  other v2: 47.715,13.731 128.297,13.731 49.343,49.088 126.67,49.088 165.354,59.817 7.863,61.225 49.343,100.709 126.67,100.709 95.475,104.888 78.524,105.193 7.863,114.787 168.15,114.787 68.006,121.11 108.006,121.11 54.604,130.685 118.371,130.685

## Silkscreen, mask and mechanical layers (free items; w line width, h text height)
Top Overlay:
  lines w0.254: 105.791,83.82 66.791,83.82 66.791,100.457 105.791,100.457 ; 126.619,49.149 126.619,100.711 49.276,100.711 49.276,49.022 126.746,49.022
  text "GND" at 123.952,90.678 h1.52
  text "VIN" at 46.482,83.312 h1.52
Bottom Overlay:
  lines w0.254: 38.1,90.678 3.1,90.678 3.1,106.553 38.1,106.553 ; 38.481,67.116 3.481,67.116 3.481,82.991 38.481,82.991 ; 136.473,66.294 171.473,66.294 ; 136.6,82.169 171.6,82.169 171.6,66.294 ; 138.303,90.683 173.303,90.683 173.303,106.558 ; 138.303,106.685 173.303,106.685
  text "GND" at 123.952,90.678 h1.52
  text "VIN" at 46.482,83.312 h1.52
Mechanical 1:
  the board outline again, w1.2

## Text inside footprints (layer, text, board x,y; h text height)
7809: Top Overlay "A17,5mm" at 10.204,72.005 h1.02 r90
P0: Bottom Overlay "1" at 112.903,73.914 h1.27; Bottom Overlay "2" at 112.903,76.454 h1.27; Bottom Overlay "40" at 60.071,76.454 h1.27; Bottom Overlay "39" at 60.071,73.914 h1.27
U4: Mechanical 7 "IN +" at 22.225,108.453 h1.97 r270; Mechanical 7 "IN -" at 10.795,108.453 h1.97 r270; Mechanical 7 "OUT +" at 22.225,70.353 h1.97 r270; Mechanical 7 "OUT -" at 10.795,70.353 h1.97 r270